# EAGLE board LED_Platine_1_v2 (EAGLE 9.7.0)
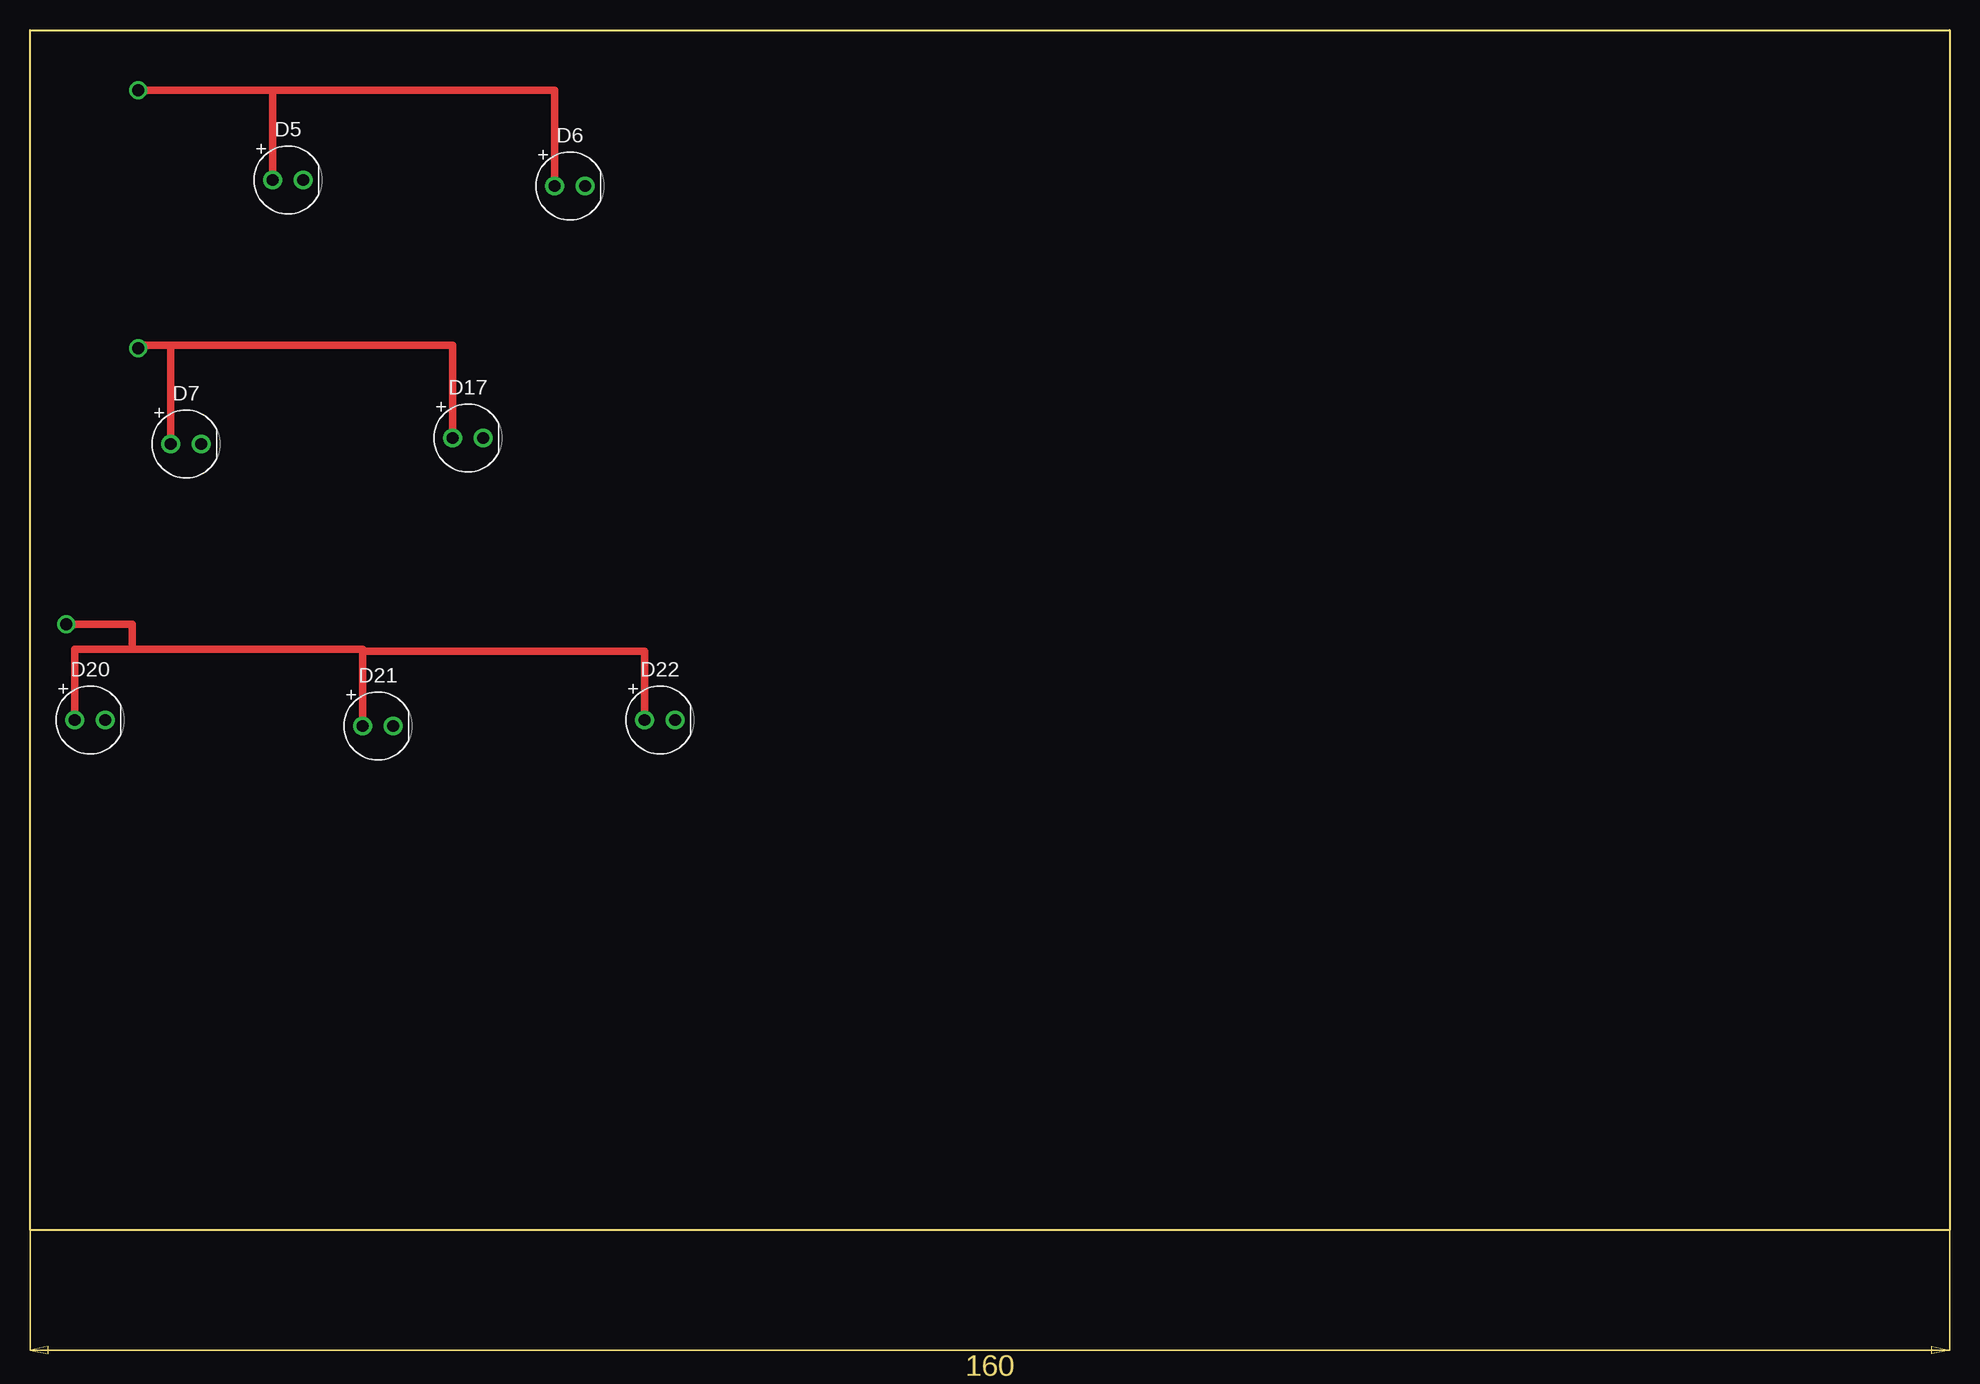
[diagram p0: board, top side]

Size 160 x 100 mm. Coordinates in mm from the lower left corner, seen from the top.
Outline: 0,100 160,100 160,0 0,0 0,100
Copper layers (1*16): Top 0.035mm / dielectric 1.5mm / Bottom 0.035mm
Design rules "Fusion Electronics Design Rules": minimum track width 6mil, minimum drill 0.35mm, track to track 6mil, track to pad 6mil, pad to pad 6mil, via to via 6mil, smd to smd 6mil, copper to edge 40mil, drill to drill 6mil, minimum pad ring 10mil, minimum via ring 8mil, stop-mask expansion 4mil, vias tented up to drill 9999mil, thermal gap 10mil

## Footprints (pad centres in the part's own frame; a part is rotated, then mirrored left to right if it is on the bottom)
LEDRD254W60D565H860B_W = drill 0.981 pad 1.581: 1 -1.27,0; 2 1.27,0

## Placement (x,y rotation side)
D5  LED_WHITE  [LEDRD254W60D565H860B_W]  21.5,87.5 0 top
D6  LED_WHITE  [LEDRD254W60D565H860B_W]  45,87 0 top
D7  LED_WHITE  [LEDRD254W60D565H860B_W]  13,65.5 0 top
D17  LED_WHITE  [LEDRD254W60D565H860B_W]  36.5,66 0 top
D20  LED_WHITE  [LEDRD254W60D565H860B_W]  5,42.5 0 top
D21  LED_WHITE  [LEDRD254W60D565H860B_W]  29,42 0 top
D22  LED_WHITE  [LEDRD254W60D565H860B_W]  52.5,42.5 0 top

## Library data of the parts
D5-D7 D17 D20-D22 = Tinkercad; CATEGORY: Opto-Electronic; SUB-CATEGORY: LED

## Nets
N$9: D5.1 D6.1
N$10: D7.1 D17.1
N$13: D20.1 D21.1 D22.1

## Tracks (layer width: path | path; a pad name or v marks a point on that pad's centre or on a via)
N$4  (via drill 1)
  other vias: 9,95
N$5  (via drill 1)
  other vias: 9,73.5
N$8  (via drill 1)
  other vias: 3,50.5
N$9
  Top 0.61: D6.1 43.73,95 20.23,95 | 20.23,95 D5.1 | 20.23,95 9,95
N$10
  Top 0.61: D7.1 11.73,73.75 | 11.73,73.75 12,73.75 35.23,73.75 D17.1 | 11.73,73.75 9,73.75 9,73.5
N$13
  Top 0.61: D22.1 51.23,48.25 27.73,48.25 D21.1 27.73,48.38 8.5,48.38 | 8.5,48.38 3.73,48.38 D20.1 | 8.5,48.38 8.5,50.5 3,50.5